# Altium PCB PCB.PcbDoc
Units mm, origin at the board's own origin, x right, y up, seen from the top; angles counter-clockwise.
Board outline 152.4 x 101.6 mm, 2 copper layers (Top Layer, Bottom Layer); 27 components, 22 nets, 77 pads, 0 vias.
Unrouted connection lines stored in the file: 50.
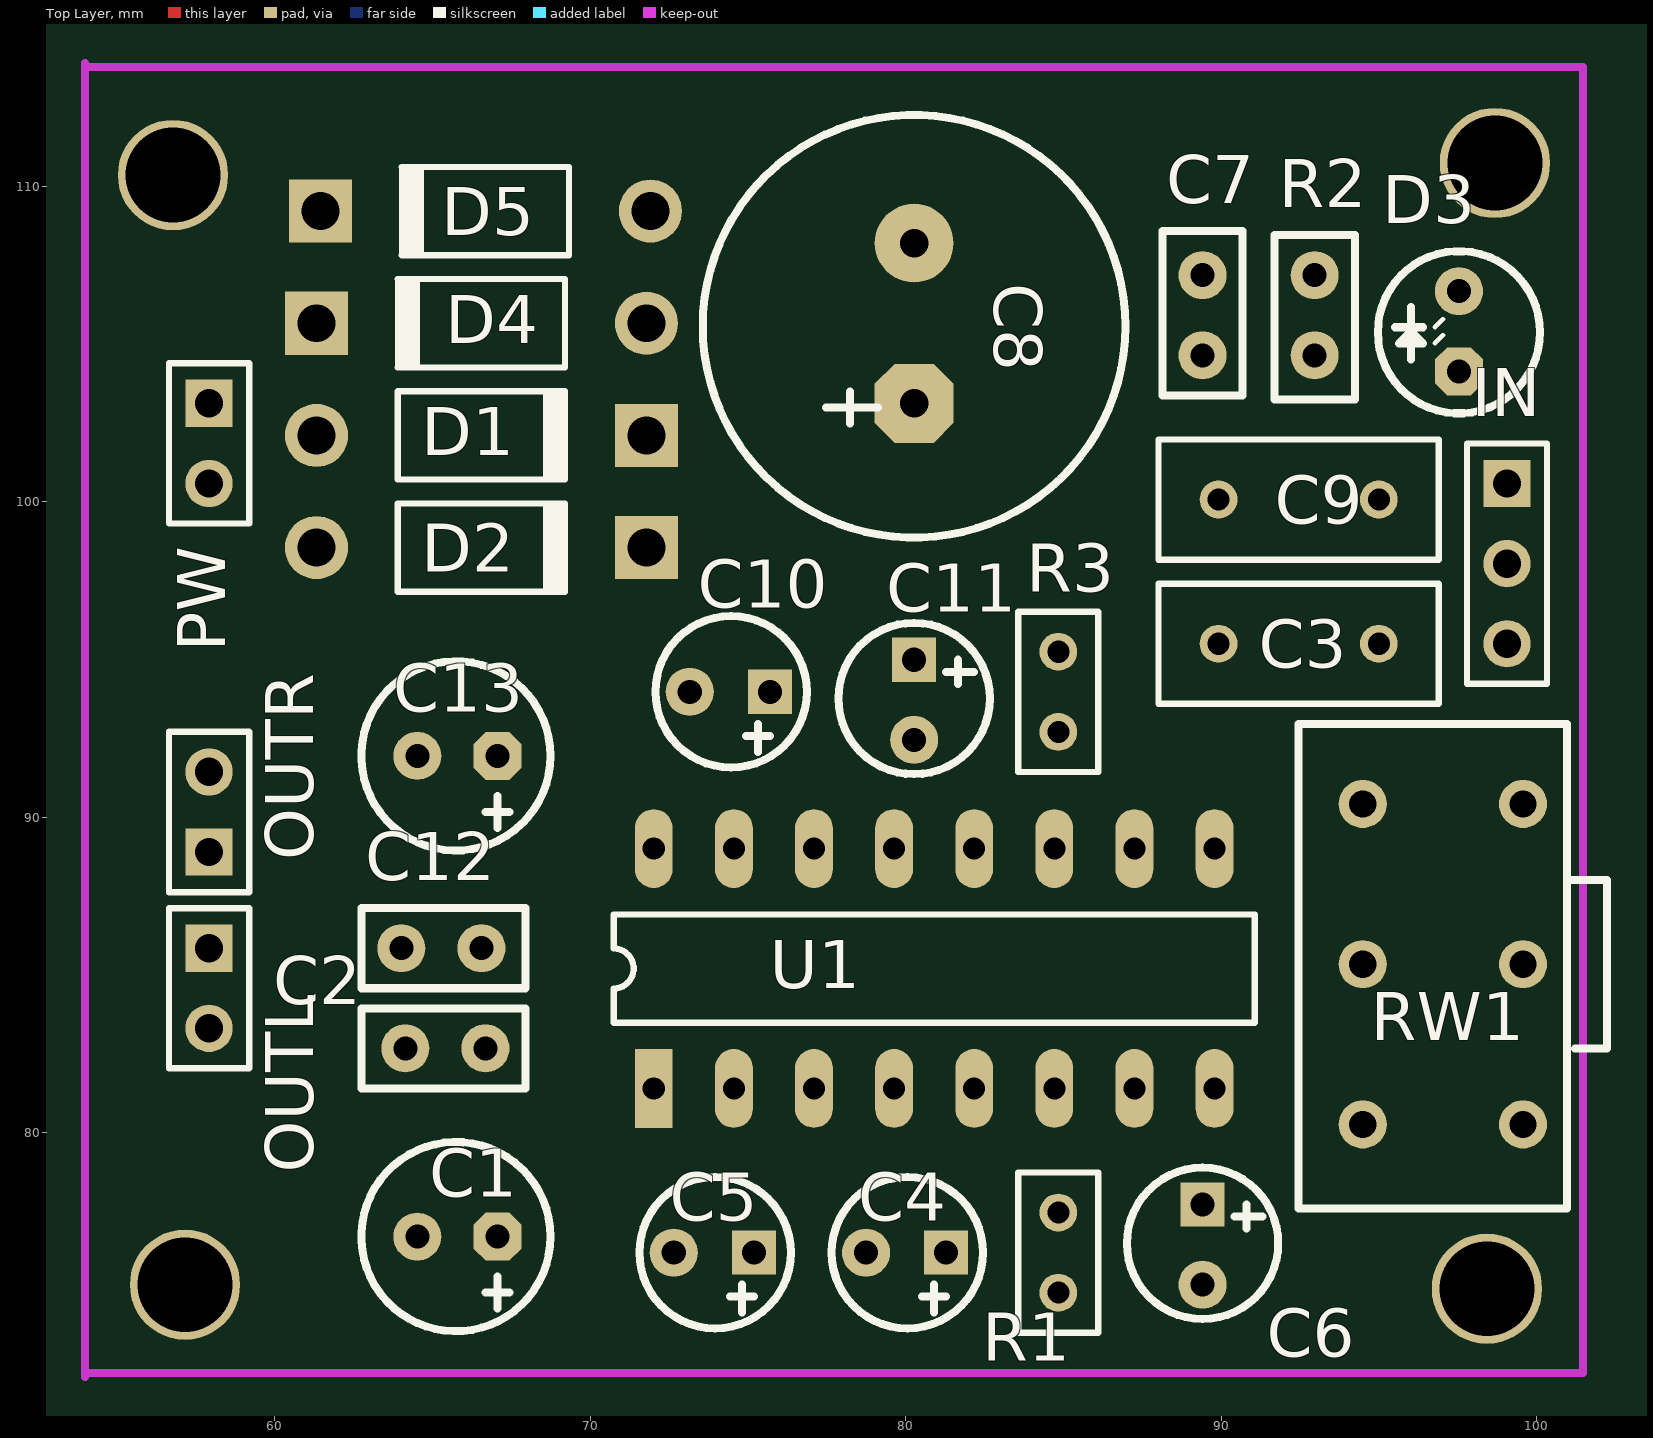
[diagram p0: Top Layer view]
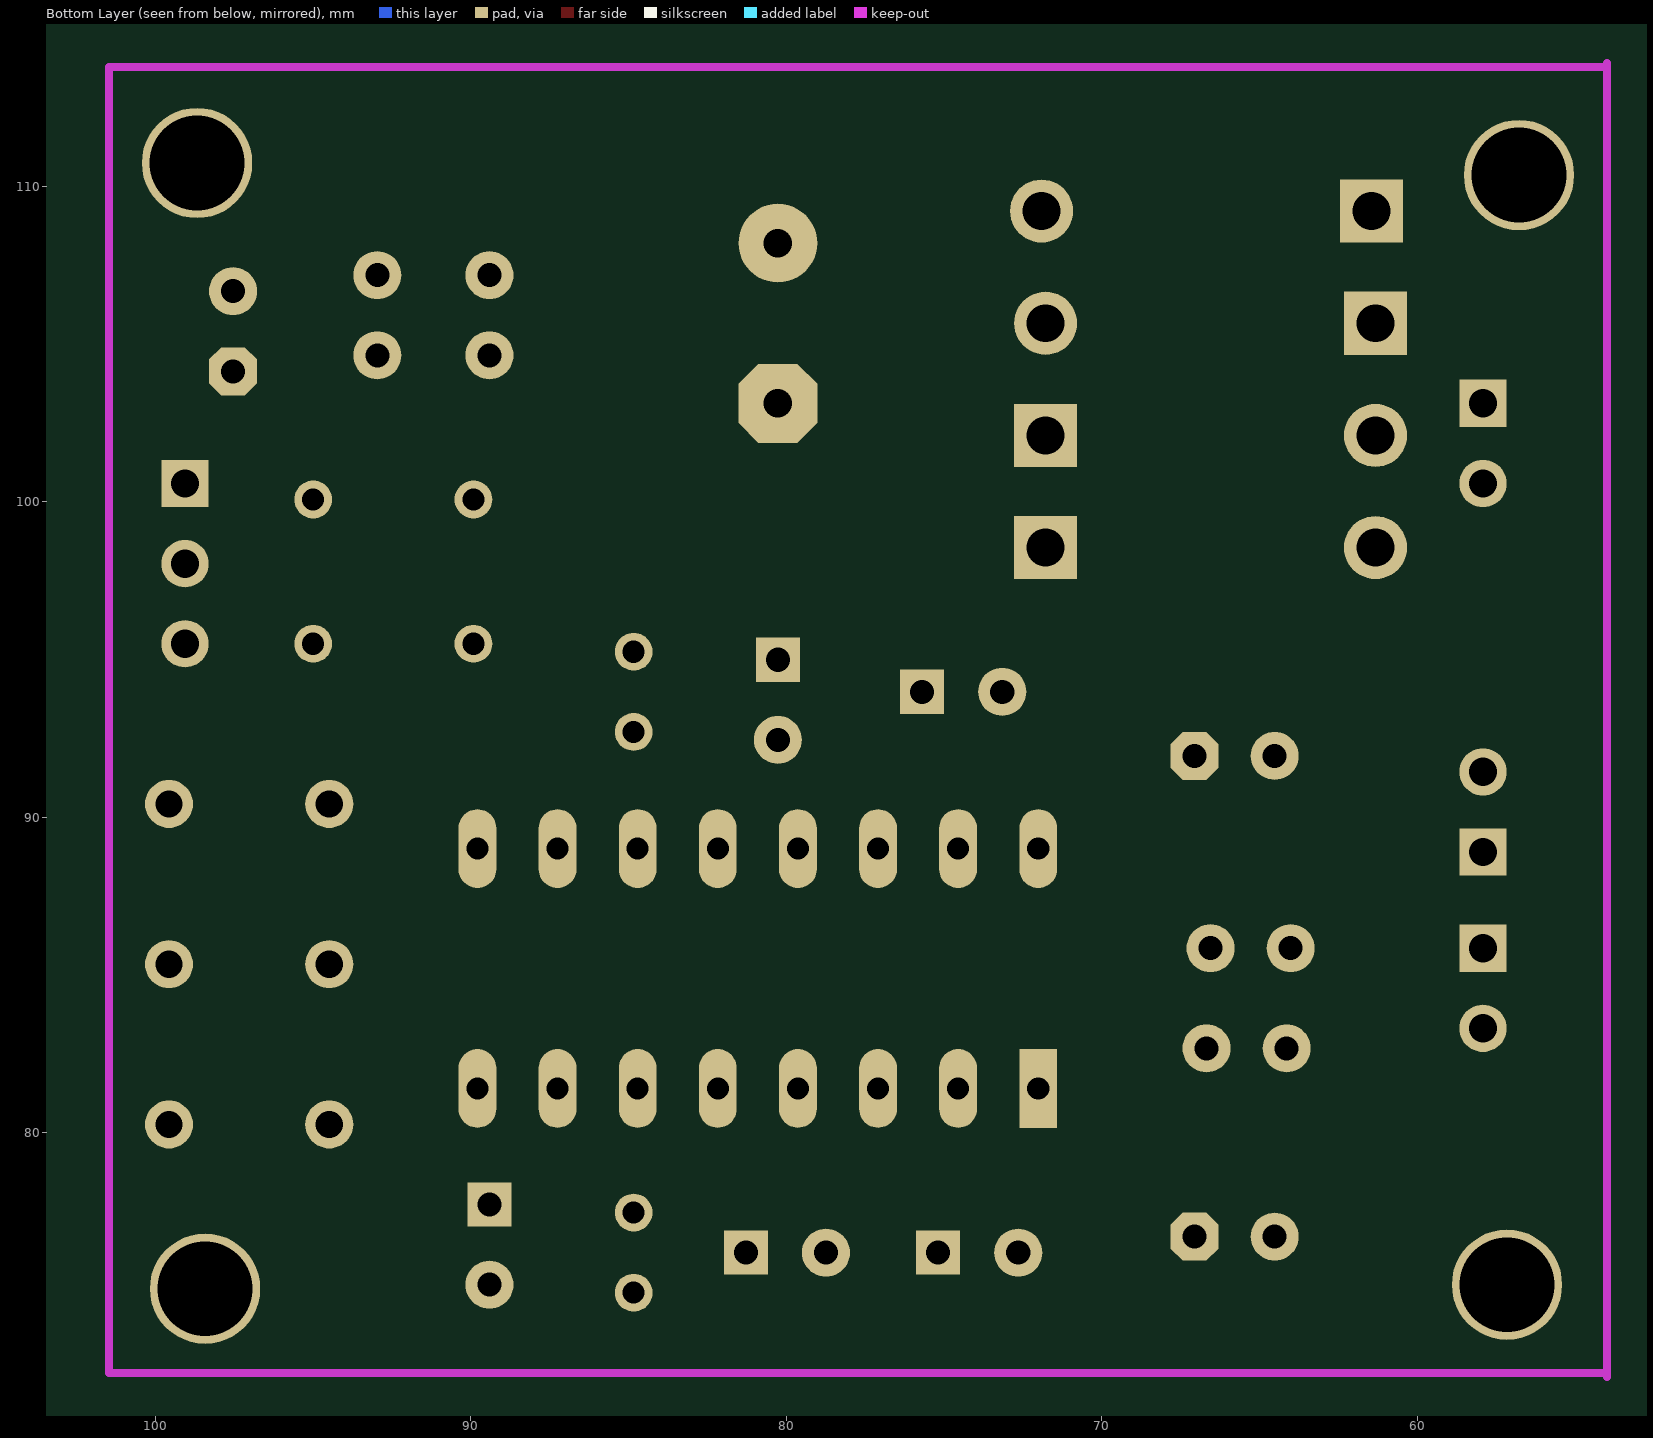
[diagram p1: Bottom Layer view, seen from below]

## Layer stack, top to bottom
Top Layer: signal copper 0.0356
Dielectric: dielectric 0.32, FR-4, Dk 4.8
Bottom Layer: signal copper 0.0356

## Board outline
25.4,25.4 177.8,25.4 177.8,127 25.4,127

## Design rules (kind name [scope] priority, off if disabled: settings)
Clearance [All] p1: gap=0.254
PolygonConnect [All] p1: connectstyle=Relief reliefconductorwidth=0.254 reliefentries=4 polygonreliefangle="90 Angle"
RoutingVias [All] p1: holewidth=0.711 width=1.27 viastyle="Through Hole" minholewidth=0.711 minwidth=1.27 maxholewidth=0.711 maxwidth=1.27
SilkscreenOverComponentPads [All] p1: minsilkscreentomaskgap=0.254
SolderMaskExpansion [All] p1: expansion=0.102
Width [All] p1: maxlimit=0.254 minlimit=0.254 preferedwidth=0.254
27 further rules are at their usual default settings.

## Components (designator, comment, footprint, x,y, rotation, side; value= is the part's Value field where it differs from the comment)
C1 "470u" CF0.1-6.5 67.056,76.708 r180 top
C2 "0.1u" RAD0.1 64.135,82.677 r0 top
C3 "0.22" RAD-0.2 92.456,95.504 r180 top
C4 "100u" CF0.1 81.28,76.2 r180 top
C5 "100u" CF0.1 75.184,76.2 r180 top
C6 "100u" CF0.1 89.408,77.724 r270 top
C7 "Cap" RAD0.1 89.408,107.188 r270 top
C8 "CF" CF0.2-13 80.264,103.124 r90 top
C9 "0.22" RAD-0.2 92.456,100.076 r180 top
C10 "100u" CF0.1 75.692,93.98 r180 top
C11 "100u" CF0.1 80.264,94.996 r270 top
C12 "0.1u" RAD0.1 66.548,85.852 r180 top
C13 "470u" CF0.1-6.5 67.056,91.948 r180 top
D1 "Diode 1N4007" DIO10.46-5.3x2.8 66.548,102.108 r0 top
D2 "Diode 1N4007" DIO10.46-5.3x2.8 66.548,98.552 r0 top
D3 "LED0" LED 97.536,104.14 r90 top
D4 "Diode 1N4007" DIO10.46-5.3x2.8 66.548,105.664 r180 top
D5 "Diode 1N4007" DIO10.46-5.3x2.8 66.675,109.22 r180 top
IN "" HDR1X3 99.06,100.584 r270 top
OUTL "Header 2" HDR1X2 57.912,85.852 r270 top
OUTR "Header 2" HDR1X2 57.912,88.9 r90 top
PW "Header 2" HDR1X2 57.912,103.124 r270 top
R1 "1k" RAD-0.1 84.836,76.2 r270 top
R2 "Res" RAD0.1 92.964,104.648 r90 top
R3 "1k" RAD-0.1 84.836,93.98 r270 top
RW1 "RW" RW 99.568,80.264 r180 top
U1 "TEA2025" DIP16 72.009,81.407 r90 top

## Footprints (in the part's own frame and the unit in brackets; to place one, negate y for a bottom-side part, rotate by r counter-clockwise, add the part's x,y. Pads: shape width x height; smd on the part's side, far side on the other; paste and mask are expansions set on the pad)
CF0.1 [mil]
  rect 55.12x55.12 hole 30: 1(0,0)
  round 60 hole 30: 2(100,0)
  silkscreen extent -46,-94 143,94
CF0.1-6.5 [mil]
  oct 60x60 hole 30: 1(0,0)
  round 60 hole 30: 2(100,0)
  silkscreen extent -66,-118 170,118
CF0.2-13 [mm]
  oct 2.5x2.5 hole 0.9: 1(0,0)
  round 2.5 hole 0.9: 2(5.08,0)
  silkscreen extent -4.25,-6.7 9.14,6.7
DIO10.46-5.3x2.8 [mm] "Diode, Axial; Body 5.2 x 2.7 mm (LxDia. max), Lead Dia. 0.86 mm (max)"
  round 2 hole 1.2: 1(-5.23,0)
  rect 2x2 hole 1.2: 2(5.23,0)
  silkscreen extent -2.65,-1.4 2.75,1.4
DIP16 [mm]
  rect 2.5x1.2 hole 0.7: 1(0,0)
  oval 2.5x1.2 hole 0.7: 2(0,-2.54) 3(0,-5.08) 4(0,-7.62) 5(0,-10.16) 6(0,-12.7) 7(0,-15.24) 8(0,-17.78) 9(7.6,-17.78) 10(7.6,-15.24) 11(7.6,-12.7) 12(7.6,-10.16) 13(7.6,-7.62) 14(7.6,-5.08) 15(7.6,-2.54) 16(7.6,0)
  silkscreen extent 2.08,-19.05 5.52,1.27
HDR1X2 [mm] "Connector; Header; 2 Position"
  rect 1.5x1.5 hole 0.9: 1(0,0)
  round 1.5 hole 0.9: 2(2.54,0)
  silkscreen extent -1.27,-1.27 3.81,1.27
HDR1X3 [mm] "Connector; Header; 3 Position"
  rect 1.5x1.5 hole 0.9: 1(0,0)
  round 1.5 hole 0.9: 2(2.54,0) 3(5.08,0)
  silkscreen extent -1.27,-1.27 6.35,1.27
LED [mil]
  oct 60x60 hole 30: 1(0,0)
  round 60 hole 30: 2(100,0)
  silkscreen extent -52,-101 150,101
RAD0.1 [mil]
  round 60 hole 30: 1(0,0) 2(100,0)
  silkscreen extent -55,-50 150,50
RAD-0.1 [mm] "Radial Cap, Thru-Hole; 2 Leads; 0.1 in Pin Spacing"
  round 1.2 hole 0.7: 1(-1.27,0) 2(1.27,0)
  silkscreen extent -2.54,-1.27 2.54,1.27
RAD-0.2 [mm] "Radial Cap, Thru-Hole; 2 Leads; 0.2 in Pin Spacing"
  round 1.2 hole 0.7: 1(-2.54,0) 2(2.54,0)
  silkscreen extent -4.44,-1.91 4.44,1.91
RW [mil]
  round 60 hole 33.94: 1(0,0) 2(0,-200) 3(0,-400) 4(200,0) 5(200,-200) 6(200,-400)
  silkscreen extent -105,-500 280,105

## Part data
C1 C13: library part CF
C2 C3 C9 C12: library part Cap
C4 C5 C6 C10 C11: library part "Cap Pol"
D1 D2 D4 D5: "1 Amp General Purpose Rectifier"
IN: library part "Header 3H", "Header, 3-Pin, Right Angle"
OUTL OUTR PW: "Header, 2-Pin"
R1 R3: library part Res, "Resistor"
R2: "Resistor"

## Free pads (board coordinates)
  round 3.5 hole 3: 0(98.679,110.744) 1(56.769,110.363) 2(57.15,75.184) 3(98.425,75.057)

## Nets (pads, with @x,y where several pads share a name; then routed paths per layer and width w, separated by ;. In a path a pad name is that pad's centre, name@x,y a point inside that pad or via, vN(x,y) a via of type N, cw(c..) or ccw(c..) an arc to the next point about the centre after c; other vN are vias at no path point)
GND: C2.1 C4.2 C6.2 C7.1 C8.2 C11.2 C12.2 D4.1 D5.1 IN.2 OUTL.1 OUTR.1 R2.1 RW1.1 RW1.4 U1.4 U1.5 U1.9 U1.12 U1.13
NetC1_1: C1.1 C2.2 C5.2 U1.2
NetC1_2: C1.2 OUTL.2
NetC3_1: C3.1 RW1.2
NetC3_2: C3.2 U1.7
NetC4_1: C4.1 R1.2
NetC5_1: C5.1 U1.3
NetC6_1: C6.1 U1.8
NetC9_1: C9.1 RW1.5
NetC9_2: C9.2 U1.10
NetC10_1: C10.1 U1.14
NetC10_2: C10.2 C12.1 C13.1 U1.15
NetC11_1: C11.1 R3.1
NetC13_2: C13.2 OUTR.2
NetD1_1: D1.1 D4.2 PW.1
NetD2_1: D2.1 D5.2 PW.2
NetD3_2: D3.2 R2.2
NetIN_1: IN.1 RW1.6
NetIN_3: IN.3 RW1.3
NetR1_1: R1.1 U1.6
NetR3_2: R3.2 U1.11
VCC: C7.2 C8.1 D1.2 D2.2 D3.1 U1.16
pads on no net: U1.1

## Keep-outs
Keep-Out Layer:
  lines w0.254: 53.975,72.263 53.975,113.919 ; 53.975,113.792 101.473,113.792 101.473,72.39 54.102,72.39